# Altium PCB fpga_board.PcbDoc (part 4 of 4)
Units mil, origin at the board's own origin, x right, y up, seen from the top; angles counter-clockwise.
Board outline 3204.72 x 2960.63 mil, 6 copper layers (Top Layer, GND1, SIG, PWR, GND2, Bottom Layer), stack 32.112 mil thick; 192 components, 182 nets, 714 pads, 321 vias.
Unrouted connection lines stored in the file: 11.
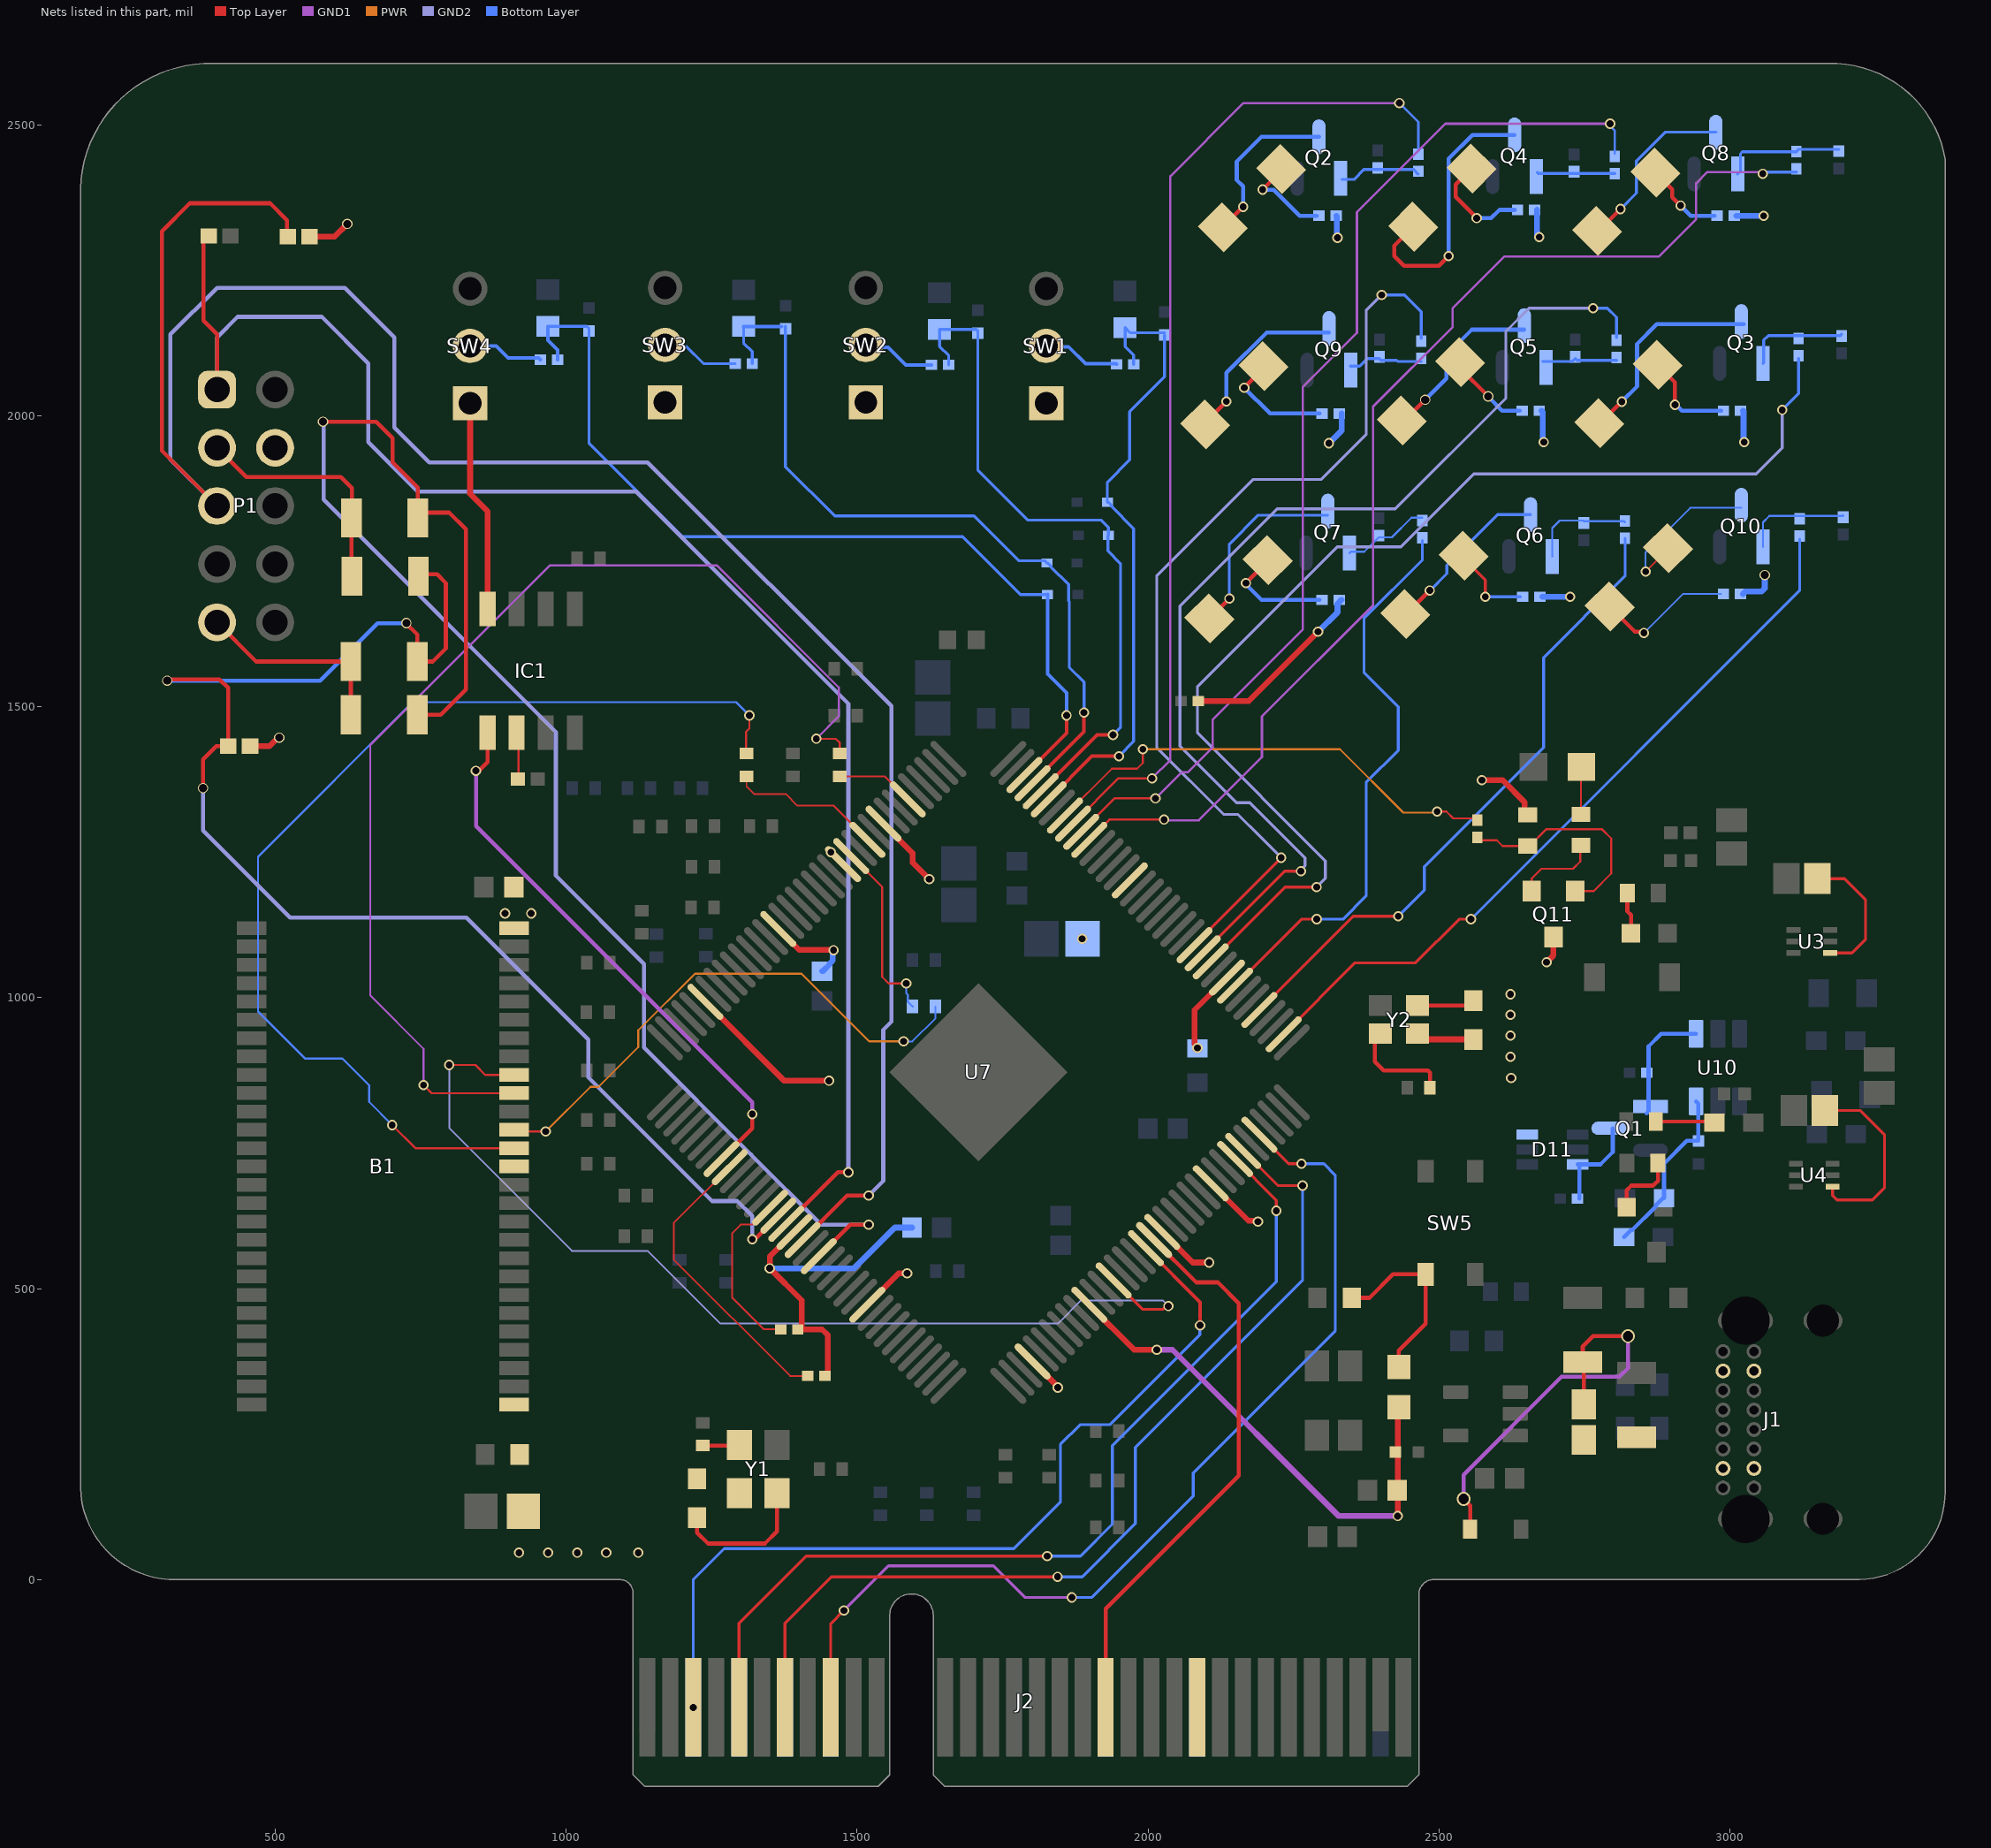
[diagram p7: the nets of this part, all layers, seen from the top]

## Via types
v1: diameter 17.72, hole 11.81, Top Layer to Bottom Layer, 284 vias
v2: diameter 19.68, hole 7.87, Top Layer to Bottom Layer, 25 vias
v3: diameter 17.72, hole 13.78, Top Layer to Bottom Layer, 10 vias
v4: diameter 23.62, hole 17.72, Top Layer to Bottom Layer, 2 vias

## Nets (pads, with @x,y where several pads share a name; then routed paths per layer and width w, separated by ;. In a path a pad name is that pad's centre, name@x,y a point inside that pad or via, vN(x,y) a via of type N, cw(c..) or ccw(c..) an arc to the next point about the centre after c; other vN are vias at no path point) (continued)
INT3: J2.A19 J2.B19 U7.55 | length 979.8
  Top Layer w7: J2.B19@1927.17,-219.49 1927.17,-50.2 2156,178.64 2156,474.9 2120.08,510.83 2083.28,510.83 U7.55@2010.46,583.64
INT4: J2.A23 J2.B23
IO1: R90.2 U7.100 | length 1758.1
  Top Layer w3: U7.100@1871.26,1299.1 U7.100@1871.26,1300.18
  Top Layer w4: U7.100@1871.26,1300.18 1872.34,1300.18 1949.13,1376.97 v1(2006.89,1376.97)
  GND1 w4: v1(2006.89,1376.97) 2038.39,1408.46 2038.39,2411.8 2163.98,2537.4 v1(2432.09,2537.4)
  Bottom Layer w4: v1(2432.09,2537.4) 2464.57,2504.92 R90.2@2464.57,2454.86
IO1_RES: Q2.1 R1_2.2 R90.1 | length 141.2
  Bottom Layer w5: Q2.1@2333.66,2406.1 2353.94,2406.1 2370.92,2423.09 2394.68,2423.09 2456.69,2423.09 R90.1@2464.57,2415.21
IO2: R91.2 U7.84 | length 1858.7
  Top Layer w5: U7.84@2093.97,1076.39 2235.1,1217.52 v1(2262.8,1217.52)
  GND2 w5: v1(2262.8,1217.52) 2262.8,1219.6 2270,1226.81 2270,1240 2175,1335 2152.2,1335 2055,1432.2 2055,1673.11 2221.89,1840 2425,1840 2615,2030 2615,2145 2655,2185 v1(2765,2185)
  Bottom Layer w5: v1(2765,2185) 2789.41,2185 2805.12,2169.29 R91.2@2805.12,2134.84
IO2_RES: Q5.1 R2_2.2 R91.1 | length 130.4
  Bottom Layer w5: Q5.1@2677.99,2093.5 2729.47,2093.5 2734.25,2098.28 2737.34,2095.19 R91.1@2805.12,2095.19
IO3: R92.2 U7.98 | length 1988.7
  Top Layer w4: U7.98@1899.1,1271.26 1933.94,1306.1 v1(2027.56,1306.1)
  GND1 w4: v1(2027.56,1306.1) 2028.66,1305 2087.48,1305 2195.87,1413.39 2195.87,1483.27 2386.81,1674.21 2386.81,2015.75 2523.57,2152.51 2523.57,2184.94 2612.26,2273.62 2877.95,2273.62 2941.93,2337.6 2941.93,2399.61 2961.18,2418.86 v1@3056.43,2418.86
  Bottom Layer w5: v1@3056.15,2417.15 3057.89,2418.88 R92.2@3114.17,2418.88
  other v1: 3056.43,2415.91
IO3_RES: Q8.1 R3_2.2 R92.1 | length 208.6
  Bottom Layer w5: Q8.1@3013.32,2415.68 3018.24,2420.59 3018.24,2450.25 3021.72,2453.74 R92.1@3114.17,2453.74 3118.39,2457.96 R3_2.2@3187.01,2457.96
IO4: R93.2 U7.83 | length 2016.9
  Top Layer w5: U7.83@2107.89,1062.47 2235.42,1190 v1(2289.79,1190)
  GND2 w5: v1(2289.79,1190) 2305,1205.21 2305,1235 2085,1455 2085,1535 2325,1775 2435,1775 2560,1900 3045,1900 3090,1945 v1(3090,2010)
  Bottom Layer w5: v1(3090,2010) 3118.11,2038.11 R93.2@3118.11,2098.28
IO4_RES: Q3.1 R4_2.2 R93.1 | length 178.2
  Bottom Layer w5: Q3.1@3057.09,2090.15 3058.07,2091.13 3058.07,2129.92 3066.09,2137.94 3189.96,2137.94 R4_2.2@3191.93,2139.9
IO5: R94.2 U7.77 | length 1116.2
  Top Layer w5: U7.77@2191.41,978.96 2352.45,1140 v1(2430,1140)
  Bottom Layer w5: v1(2430,1140) 2475,1185 2475,1225 2680,1430 2680,1584.53 2819.88,1724.41 R94.2@2819.88,1789.37
IO5_RES: Q6.1 R5_2.2 R94.1 | length 180.2
  Bottom Layer w3.5: Q6.1@2694.88,1758.45 2694.88,1807.08 2707.68,1819.88 2748.03,1819.88 2749.02,1818.9 2817.91,1818.9 R94.1@2819.88,1816.93
IO6: R95.2 U7.85 | length 1637
  Top Layer w5: U7.85@2080.06,1090.31 2080.06,1091.02 2229.01,1239.98 v1(2229.01,1240.68)
  GND2 w5: v1(2229.01,1240.68) 2193.29,1276.41 2154.7,1315 2130,1315 2015,1430 2015,1725 2180.75,1890.75 2298.23,1890.75 2375,1967.52 2375,2181.1 v1(2401.57,2207.68)
  Bottom Layer w5: v1(2401.57,2207.68) 2440.94,2207.68 2469.49,2179.13 R95.2@2469.49,2133.01
IO6_RES: Q9.1 R6_2.2 R95.1 | length 128.5
  Bottom Layer w5: Q9.1@2348.27,2085.24 2363.78,2085.24 2376.69,2098.14 2397.64,2098.14 2400.31,2095.47 2427.17,2095.47 2429.27,2093.36 R95.1@2469.49,2093.36
IO7: R96.2 U7.99 | length 1861.2
  Top Layer w4: U7.99@1885.18,1285.18 1942.52,1342.52 v1(2012.8,1342.52)
  GND1 w4: v1(2012.8,1342.52) 2057.77,1387.5 2068.6,1387.5 2110.95,1429.85 2110.95,1477.53 2265.95,1632.53 2265.95,2049.37 2359.05,2142.47 2359.05,2350 2511.02,2501.97 v1(2794.29,2501.97)
  Bottom Layer w4: v1(2794.29,2501.97) 2794.29,2498.26 2802.17,2490.38 R96.2@2802.17,2450.79
IO7_RES: Q4.1 R7_2.2 R96.1 | length 133.4
  Bottom Layer w5: Q4.1@2669.29,2417.91 2670.87,2416.34 R96.1@2802.03,2416.34
IO8: R97.2 U7.80 | length 988.3
  Top Layer w5: U7.80@2149.65,1020.71 2263.94,1135 v1(2290,1135)
  Bottom Layer w5: v1(2290,1135) 2335,1135 2375,1175 2375,1370 2430,1425 2430,1500 2371.15,1558.85 2371.15,1651.66 2471.46,1751.97 R97.2@2471.46,1785.29
IO8_RES: Q7.1 R8_2.2 R97.1 | length 150.2
  Bottom Layer w3.5: Q7.1@2346.46,1764.36 2348.43,1766.33 2371.79,1766.33 2387.13,1781.68 2387.13,1781.82 2396.51,1791.2 2419.09,1791.2 2452.84,1824.94 R97.1@2471.46,1824.94
IO9: R98.2 U7.74 | length 1291.1
  Top Layer w5: U7.74@2233.17,937.2 2355.97,1060 2460,1060 2535,1135 v1(2555,1135)
  Bottom Layer w5: v1(2555,1135) 3120.08,1700.08 R98.2@3120.08,1788.25
IO9_RES: Q10.1 R9_2.2 R98.1 | length 185.1
  Bottom Layer w3.5: Q10.1@3057.09,1774.6 3057.09,1816.93 3068.05,1827.9 3193.9,1827.9 R9_2.2@3194.88,1828.88
"JTAG TCK": P1.1 R103.2 U7.16 | length 2768.8
  Top Layer w7: R103.2@384.56,2309.06 376.97,2301.46 376.97,2163.39 400,2140.35 P1.1@400,2045.08 ; U7.16@1378.52,611.48 1467.03,700 v1(1485,700)
  GND2 w7: P1.1@400,2045 400,2135 435,2170 580,2170 660,2090 660,1955 745,1870 1120,1870 1485,1505 v1(1485,700)
"JTAG TDI": R102.2 R111.1 R112.1 U7.15 | length 2491.1
  Top Layer w7: v3@316.93,1547.24 404.25,1547.24 419.15,1532.34 R102.2@419.15,1432.09 398.62,1432.09 375.98,1409.45 v3(375.98,1360.24) ; v3@725.39,1642.72 744.09,1624.02 R111.1@744.09,1577.76 770.67,1577.76 793.31,1600.39 793.31,1712.6 778.24,1727.67 749.32,1727.67 R112.1@746.06,1724.41 ; v1(1320,585) 1324.19,585 U7.15@1364.6,625.4
  GND2 w7: v3(375.98,1360.24) 375.98,1287.4 525.59,1137.8 828.74,1137.8 1038.39,928.15 1038.39,863.19 1250.98,650.59 1294.29,650.59 1320,624.88 v1(1320,585)
  Bottom Layer w7: v3(314.45,1544.96) 577.44,1544.96 676.18,1643.7 v3(725.39,1643.7)
"JTAG TDO": R113.1 R114.1 U7.20 | length 2680.8
  Top Layer w7: v3(582.11,1989.78) 673.61,1989.78 701.77,1961.61 701.77,1920.28 745.08,1876.97 R113.1@745.08,1824.8 ; R114.1@744.09,1486.22 784.45,1486.22 827.76,1529.53 827.76,1805.12 799.21,1833.66 R113.1@746.06,1833.66 ; U7.20@1434.19,555.81 1488.39,610 v1(1520,610)
  GND2 w7: v3@583.17,1989.78 583.17,1855.81 982.28,1456.69 982.28,1209.65 1133.86,1058.07 1133.86,914.37 1317.91,730.32 1438.23,610 v1(1520,610)
"JTAG TMS": P1.5 R101.2 U7.18 | length 3777.6
  Top Layer w7: P1.5@400,1845.08 305.12,1939.96 305.12,2316.93 353.35,2365.16 491.14,2365.16 520.53,2335.77 R101.2@520.53,2308.07 ; U7.18@1406.36,583.64 1482.71,660 v1(1520,660)
  GND2 w7: P1.5@400,1845 320,1925 320,2140 400,2220 620,2220 705,2135 705,1980 765,1920 1140,1920 1558.87,1501.13 1558.87,958.87 1545,945 1545,685 v1(1520,660)
"Lower Byte Mask": B1.15 R67.2 | length 1851.9
  Top Layer w3.5: v1(701.14,781.25) 740.89,741.5 B1.15@910.51,741.5 ; R67.2@1310,1419.68 1309.06,1420.63 1309.06,1456.69 1315,1462.64 v1(1315,1485)
  Bottom Layer w3.5: v1(701.14,781.25) 661.42,820.97 661.42,849.41 615.16,895.67 551.18,895.67 470.47,976.38 470.47,1242.13 736.08,1507.74 1292.26,1507.74 v1(1315,1485)
"Lower Byte Mask Term": R67.1 U7.119 | length 263.5
  Top Layer w3: R67.1@1310,1380.32 1310,1363.23 1323.23,1350 1377.5,1350 1397.5,1330 1460,1330 1517.71,1272.29 U7.119@1517.71,1271.26
MEM_CS: IC1.1 U7.8 | length 958.5
  Top Layer w7: v1@850,1390 865,1405 IC1.1@865,1456.5 ; U7.8@1267.16,722.84 1320,775.68 v1(1320,800)
  GND1 w7: v1(845,1390) 845,1295 1320,820 v1(1320,800)
nCEO: R88.2 U7.101 | length 821.6
  Top Layer w3.5: U7.101@1857.34,1313.02 1938.02,1393.7 1981.3,1393.7 1991.14,1403.54 v1(1991.14,1427.17) ; v1(2497.05,1319.88) 2512.8,1319.88 2524.61,1308.07 2563.84,1308.07 R88.2@2565.94,1310.18
  PWR w3.5: v1(1991.14,1427.17) 2329.72,1427.17 2438.98,1317.91 2495.08,1317.91 v1(2497.05,1319.88)
nCONFIG: R75.2 U7.14 | length 296.8
  Top Layer w3: U7.14@1350.68,639.32 1348.29,639.32 1318.97,610 1300,610 1285,595 1285,485 1340,430 R75.2@1365,430
NetC29_1: C29.1 R109.1 R110.2 U10.3 | length 301.7
  Bottom Layer w7: R110.2@2817.91,588.58 2830.16,600.83 2832.13,600.83 2872.59,641.3 2872.59,643.26 2884.84,655.51 R109.1@2886.81,655.51 2886.81,714.57 2926.18,753.94 C29.1@2945.87,753.94 2945.87,817.91 U10.3@2941.93,821.85
NetCJ_2_2: CJ_2.2 D6.2 FB1.2 | length 696.5
  Top Layer w7: v4(2542.32,138.78) 2554.13,126.97 2554.13,88.58 D6.2@2555.12,87.6 ; FB1.2@2749.02,301.22 2749.02,372.05 CJ_2.2@2747.05,374.02 2747.05,400.59 2764.76,418.31 v4(2824.8,418.31)
  GND1 w7: v4(2542.32,138.78) 2542.32,180.12 2710.63,348.43 2810.04,348.43 2824.8,363.19 v4(2824.8,418.31)
NetD1_1_1: D1_1.1 Q2.3 | length 285.7
  Top Layer w7: D1_1.1@2136.99,2325.62 2136.99,2332.86 v1(2163.39,2359.25)
  Bottom Layer w7: v1(2163.39,2359.25) 2163.39,2394.17 2152.56,2404.99 2152.56,2437.01 2195.02,2479.47 Q2.3@2293.83,2479.47
NetD1_1_2: D1_1.2 R1_1.2 | length 160.1
  Top Layer w7: v1(2196.85,2388.78) 2228.86,2420.79 D1_1.2@2228.86,2423.97
  Bottom Layer w7: v1(2196.85,2388.78) 2197.51,2388.12 2216.21,2388.12 2260.47,2343.86 R1_1.2@2289.91,2343.86
NetD1_2_1: D1_2.1 Q5.3 | length 298.7
  Top Layer w7: D1_2.1@2436.11,1992.21 2441.03,1992.21 v3(2476.38,2027.56)
  Bottom Layer w7: v3(2476.38,2027.56) 2512.8,2063.98 2512.8,2104.33 2556.5,2148.03 Q5.3@2646.65,2148.03
NetD1_2_2: D1_2.2 R2_1.2 | length 143.6
  Top Layer w7: D1_2.2@2536.33,2092.43 2536.33,2081.78 v3(2584.65,2033.46)
  Bottom Layer w7: v3(2584.65,2033.46) 2584.65,2032.96 2608.75,2008.86 R2_1.2@2638.75,2008.86
NetD1_3_1: D1_3.1 Q8.3 | length 306.7
  Top Layer w7: D1_3.1@2771.74,2318 2774.69,2318 v1(2812.01,2355.32)
  Bottom Layer w5: v1(2812.01,2355.32) 2839.39,2382.7 2839.39,2437.97 2888.77,2487.35 Q8.3@2975.92,2487.35
NetD1_3_2: D1_3.2 R3_1.2 | length 140.6
  Top Layer w7: D1_3.2@2871.96,2418.22 2901.08,2389.1 2901.08,2375.5 v1(2915.35,2361.22)
  Bottom Layer w7: v1(2915.35,2361.22) 2932.72,2343.86 R3_1.2@2973.75,2343.86
NetD2_1_1: D2_1.1 Q3.3 | length 361.4
  Top Layer w7: D2_1.1@2775.68,1987.29 2777.18,1987.29 v1(2814.24,2024.34)
  Bottom Layer w7: v1(2814.24,2024.34) 2840.55,2050.66 2840.55,2123.64 2874.53,2157.62 Q3.3@3023.75,2157.62
NetD2_1_2: D2_1.2 R4_1.2 | length 162.4
  Top Layer w7: D2_1.2@2875.9,2087.51 2905.69,2057.72 v1(2905.69,2018.95)
  Bottom Layer w7: v1@2907.48,2018.7 2917.32,2008.86 R4_1.2@2984.91,2008.86
NetD2_2_1: D2_2.1 Q6.3 | length 294.5
  Top Layer w7: D2_2.1@2442.02,1659.54 2443.98,1659.54 v1(2484.25,1699.8)
  Bottom Layer w5: v1(2484.25,1699.8) 2484.7,1699.8 2513.75,1728.86 2513.75,1743.08 2600.79,1830.12 Q6.3@2657.48,1830.12
NetD2_2_2: D2_2.2 R5_1.2 | length 146.5
  Top Layer w5: D2_2.2@2542.24,1759.76 2542.24,1755.01 2579.72,1717.52 v1(2579.72,1688.98)
  Bottom Layer w5: v1(2579.72,1688.98) 2639.79,1688.98 R5_1.2@2639.91,1688.86
NetD2_3_1: D2_3.1 Q9.3 | length 290.9
  Top Layer w7: D2_3.1@2108.75,1998.86 2109.09,1998.86 v1(2134.84,2024.61)
  Bottom Layer w7: v1(2134.84,2024.61) 2134.84,2073.82 2204.13,2143.11 Q9.3@2311.02,2143.11
NetD2_3_2: D2_3.2 R6_1.2 | length 199.1
  Top Layer w7: v1(2165.35,2048.23) 2198.73,2081.61 D2_3.2@2198.73,2085.54
  Bottom Layer w7: v1(2165.35,2048.23) 2209.72,2003.86 R6_1.2@2294.91,2003.86
NetD3_1: D3.1 R9.2 | length 71.9
  Top Layer w7: R9.2@2823.82,1180.12 2823.82,1148.62 2829.98,1142.46 D3.1@2829.98,1110.82
NetD3_1_1: D3_1.1 Q4.3 | length 468.5
  Top Layer w7: D3_1.1@2455.8,2324.89 2423.23,2292.32 2423.23,2274.61 2439.96,2257.87 2500,2257.87 v1(2516.73,2274.61)
  Bottom Layer w7: v1(2516.73,2274.61) 2516.73,2441.93 2557.49,2482.68 Q4.3@2629.92,2482.68
NetD3_1_2: D3_1.2 R7_1.2 | length 183.2
  Top Layer w7: D3_1.2@2556.02,2425.11 2528.54,2397.64 2528.54,2375.98 v1(2564.96,2339.57)
  Bottom Layer w7: v1(2564.96,2339.57) 2589.57,2339.57 2603.86,2353.86 R7_1.2@2630.22,2353.86
NetD3_2_1: D3_2.1 Q7.3 | length 331.9
  Top Layer w7: D3_2.1@2105.4,1651.66 v1(2139.76,1686.02)
  Bottom Layer w5: v1(2139.76,1686.02) 2139.76,1779.53 2189.37,1829.13 Q7.3@2309.06,1829.13
NetD3_2_2: D3_2.2 R8_1.2 | length 194.4
  Top Layer w7: v1(2168.31,1712.6) 2205.62,1749.91 D3_2.2@2205.62,1751.88
  Bottom Layer w7: v1(2168.31,1712.6) 2168.31,1710.63 2195.08,1683.86 R8_1.2@2294.91,1683.86
NetD3_3_1: D3_3.1 Q10.3 | length 285.3
  Top Layer w3: v1(2855.31,1732.28) 2893.61,1770.58 D3_3.1@2893.61,1772.55
  Bottom Layer w3: v1(2855.31,1732.28) 2855.31,1765.32 2931.93,1841.93 Q10.3@3019.68,1841.93
NetD3_3_2: D3_3.2 R9_1.2 | length 238
  Top Layer w7: D3_3.2@2793.39,1672.33 2836.71,1629.02 2850.31,1629.02 v1(2852.36,1626.97)
  Bottom Layer w3: v1(2852.36,1626.97) 2919.25,1693.86 R9_1.2@2984.91,1693.86
NetD4_1: D4.1 R10.2 | length 117.3
  Top Layer w7: D4.1@2822.83,639.76 2822.83,669.29 2830.71,677.17 2868.03,677.17 2872.13,681.27 2872.42,681.27 2876.52,685.37 R10.2@2876.52,712.81
NetD5_2: D5.2 R89.1 | length 82
  Top Layer w3.5: R89.1@2744.09,1315.03 2744.09,1395.67 D5.2@2745.08,1396.65
NetIC1_2: IC1.2 R100.2 | length 81.1
  Top Layer w3.5: IC1.2@914.96,1455.71 918.22,1452.45 R100.2@918.22,1375.98
NetL1_1: L1.1 U3.4 | length 236.7
  Top Layer w5: L1.1@3150.47,1205 3150.75,1204.72 3196.85,1204.72 3233.27,1168.31 3233.27,1100.39 3209.65,1076.77 U3.4@3172.24,1076.77
NetL2_1: L2.1 U4.4 | length 327.1
  Top Layer w5: L2.1@3163.42,806.1 3224.41,806.1 3265.75,764.76 3265.75,673.23 3245.08,652.56 3184.06,652.56 3176.5,660.12 U4.4@3176.5,675.32
NetQ11_1: Q11.1 R87.1 R88.1 | length 387.4
  Top Layer w3.5: R88.1@2565.94,1270.53 2599.55,1270.53 2609.32,1260.76 R87.1@2652.56,1260.76 2655.58,1260.76 2684.19,1289.37 2780.51,1289.37 2796.26,1273.62 2796.26,1213.58 2765.75,1183.07 Q11.1@2734.25,1183.07
NetQ11_2: Q11.2 R89.2 | length 145.4
  Top Layer w3.5: Q11.2@2659.45,1183.07 2659.45,1204.72 2676.18,1221.46 2730.31,1221.46 2743.11,1234.25 2743.11,1260.76 R89.2@2744.09,1261.74
NetR7_2: R7.2 R8.1 | length 101.2
  Top Layer w6: R8.1@2873.03,787.4 2971.46,787.4 R7.2@2973.43,785.43
NetR70_2: R70.2 Y1.1 | length 245.4
  Top Layer w7: R70.2@1225,106.54 1225,80.81 1243.81,62.01 1341.54,62.01 1362.48,82.95 Y1.1@1362.48,148.66
NetR71_2: R71.2 Y2.1 | length 99.2
  Top Layer w7: Y2.1@2463.35,986.61 2550.59,986.61 R71.2@2559.06,995.08
NetR72_1: R72.1 Y1.3 | length 63.4
  Top Layer w7: R72.1@1234.57,230.32 1296.5,230.32 Y1.3@1297.52,231.34
NetR73_1: R73.1 Y2.3 | length 169
  Top Layer w7: Y2.3@2390,930.04 2390,890 2405,875 2480.9,875 2485,870.9 2485,845.32 R73.1@2484.68,845
NetR105_1: R105.1 SW1.2 | length 133.9
  Bottom Layer w6: SW1.2@1825,2120 1826.24,2118.76 1863.53,2118.76 1892.72,2089.57 1944.88,2089.57 R105.1@1945.87,2088.58
NetR106_1: R106.1 SW2.2 | length 127
  Bottom Layer w6: SW2.2@1515,2121.57 1518.84,2117.73 1553.53,2117.73 1583.66,2087.6 R106.1@1627.95,2087.6
NetR107_1: R107.1 SW3.2 | length 133.6
  Bottom Layer w5: SW3.2@1170,2121.57 1172.81,2118.76 1207.03,2118.76 1236.22,2089.57 R107.1@1290.35,2089.57
NetR108_1: R108.1 SW4.2 | length 130.5
  Bottom Layer w6: SW4.2@835,2120 880,2120 900.59,2099.41 952.76,2099.41 R108.1@955.71,2096.46
NRST: C35.1 R61.2 SW5.1 | length 323.2
  Top Layer w7: C35.1@2349.41,484.25 2380.91,484.25 2421.26,524.61 SW5.1@2477.36,524.61 2477.36,439.96 2431.1,393.7 R61.2@2431.1,365.22
nSTATUS: R76.2 U7.9 | length 508.2
  Top Layer w3: U7.9@1281.08,708.92 1185,612.84 1185,550 1385,350 R76.2@1411.67,350
"Row Address Strobe": B1.18 R65.2 | length 1969.6
  Top Layer w3.5: v1(755,850) 769.02,835.98 B1.18@910.51,835.98 ; v1(1430,1445) 1463.46,1445 1470.47,1437.99 1470.47,1420.16 R65.2@1470,1419.68
  GND1 w3.5: v1(755,850) 755,912.32 663.39,1003.94 663.39,1434.06 972.44,1743.11 1258.86,1743.11 1468.5,1533.46 1468.5,1483.5 v1(1430,1445)
"Row Address Strobe Term": R65.1 U7.114 | length 133.7
  Top Layer w3: R65.1@1470,1380.32 1547.85,1380.32 U7.114@1587.31,1340.86
"SDRAM Select": B1.19 U7.50 | length 1739.6
  Top Layer w3.5: v1(799.01,884.32) 844.03,884.32 860.87,867.48 B1.19@910.51,867.48
  Top Layer w5: U7.50@1940.86,514.05 1990.34,464.57 2026.13,464.57 2031.56,470 v1(2035,470)
  GND2 w3: v1(799.01,884.32) 799.01,775.99 1010,565 1140,565 1264.12,440.88 1265,440 1267.49,440 1672.22,440.54 cw(c1672.24,426.18) 1672.29,440.54 1842.51,440 1845,440 1845.88,440.88 1885,480 2025,480 v1(2035,470)
"SPI MISO": J2.A9 J2.B9 U7.68 | length 1714.1
  Top Layer w5: J2.B9@1454.72,-219.49 1454.72,-75.79 v1(1477.36,-53.15) ; U7.68@2191.41,764.6 2241.44,714.57 v1(2263.78,714.57)
  GND1 w5: v1(1477.36,-53.15) 1554.13,23.62 1734.25,23.62 1788.39,-30.51 v1(1869.09,-30.51)
  Bottom Layer w5: v1(1869.09,-30.51) 1903.54,-30.51 2077.76,143.7 2077.76,183.07 2321.85,427.17 2321.85,694.91 2302.19,714.57 v1(2263.78,714.57)
"SPI MOSI": J2.A7 J2.B7 U7.66 | length 1644.6
  Top Layer w5: J2.B7@1375.98,-219.49 1375.98,-74.8 1455.71,4.92 v1(1844.49,4.92) ; U7.66@2163.57,736.76 2223.16,677.17 v1(2265.75,677.17)
  Bottom Layer w5: v1(1844.49,4.92) 1886.81,4.92 1978.35,96.46 1978.35,227.36 2265.75,514.76 v1(2265.75,677.17)
"SPI SCK": J2.A5 J2.B5 U7.65 | length 1630.2
  Top Layer w5: J2.B5@1297.24,-219.49 1297.24,-74.8 1412.4,40.35 v1(1826.77,40.35) ; U7.65@2149.65,722.84 2220.47,652.02 v1(2220.47,633.86)
  Bottom Layer w5: v1(1826.77,40.35) 1883.86,40.35 1938.98,95.47 1938.98,230.32 2220.47,511.81 v1(2220.47,633.86)
SW_IN1: C30.1 D7.1 R53.2 R105.2 U7.103 | length 1086.4
  Top Layer w6: U7.103@1829.51,1340.86 1903.64,1415 v1(1950,1415)
  Bottom Layer w5: v1(1950,1415) 1975.39,1440.39 1975.39,1806.1 1937.07,1844.43 1937.07,1846 1931.69,1851.38 D7.1@1930.12,1851.38 1930.12,1885.83 1968.5,1924.21 1968.5,2006.89 2028.54,2066.93 C30.1@2028.54,2138.5 ; R105.2@1975.39,2088.58 1975.39,2104.33 1960.63,2119.09 R53.2@1960.63,2151.57 1969.49,2142.72 C30.1@2028.54,2142.72
SW_IN2: C31.1 D8.1 R54.2 R106.2 U7.104 | length 1174.6
  Top Layer w6: U7.104@1815.59,1354.78 1912.58,1451.77 v1(1939.96,1451.77)
  Bottom Layer w5: R106.2@1657.48,2087.6 1657.48,2103.35 1641.73,2119.09 R54.2@1641.73,2148.62 1704.72,2148.62 1707.68,2145.67 C31.1@1707.68,2141.73 1707.68,1906.5 1793.31,1820.87 1919.29,1820.87 1932.09,1808.07 D8.1@1932.09,1794.29 1931.1,1793.31 1931.1,1767.72 1952.76,1746.06 1952.76,1464.57 v1(1939.96,1451.77)
SW_IN3: C32.1 D9.1 R55.2 R107.2 U7.105 | length 1336.5
  Top Layer w6: U7.105@1801.67,1368.7 1890,1457.03 v1(1890,1490)
  Bottom Layer w5: R55.2@1305,2153.5 1305,2125.12 1319.88,2110.24 R107.2@1319.88,2089.57 ; C32.1@1376.97,2153.54 C32.1@1376.97,2149.61 1376.97,1912.4 1461.61,1827.76 1700.79,1827.76 1777.56,1750.98 1822.44,1750.98 D9.1@1826.38,1747.05 1827.95,1747.05 1833.33,1741.67 1833.33,1740.1 1863.38,1710.04 1863.38,1682.35 1864.73,1681 1864.73,1567.36 1890,1542.09 v1(1890,1490)
  Bottom Layer w6: R55.2@1305,2153.5 C32.1@1370.12,2153.5
SW_IN4: C33.1 D10.1 R56.2 R108.2 U7.106 | length 1582.8
  Top Layer w6: U7.106@1787.75,1382.62 1860,1454.87 v1(1860,1485)
  Bottom Layer w5: R56.2@968.5,2153.54 1035.43,2153.54 1039.37,2149.61 C33.1@1039.37,2145.67 1039.37,1952.63 1199.77,1792.23 1681.19,1792.23 1780.51,1692.91 D10.1@1827.36,1692.91
  Bottom Layer w6: R56.2@968.5,2153.54 968.5,2129.92 985.24,2113.19 R108.2@985.24,2096.46 ; D10.1@1827.36,1692.91 1827.36,1556.5 1860,1523.86 v1(1860,1485)
TRGASDO: P1.9 R111.2 R114.2 | length 349.3
  Top Layer w7: P1.9@400,1645.08 467.32,1577.76 R111.2@629.92,1577.76 R114.2@629.92,1486.22
TRGTDO: P1.3 R112.2 R113.2 | length 403.6
  Top Layer w7: P1.3@400,1945.08 450.39,1894.68 613.19,1894.68 631.89,1875.98 R113.2@631.89,1833.66 ; R113.2@630.91,1824.8 630.91,1725.39 R112.2@631.89,1724.41
VBUS: CJ_1.2 FB1.1 J1.A4 J1.A9 J1.B4 J1.B9
VCC: B1.1 B1.14 B1.27 C11.2 C12.2 C13.1 C14.2 C23.1 C24.2 C26.1 C27.1 C28.2 D11.6 IC1.8 P1.4 Q11.3 R1_1.1 R2_1.1 R3_1.1 R4_1.1 R5_1.1 R6_1.1 R7_1.1 R8_1.1 R9_1.1 R61.1 R70.1 R71.1 R74.1 R75.1 R76.1 R87.2 R101.1 R102.1 SW1.1 SW2.1 SW3.1 SW4.1 U7.17 U7.26 U7.40 U7.47 U7.56 U7.62 U7.81 U7.93 U7.117 U7.122 U7.130 U7.139 Y1.4 Y2.4 | length 4014.5
  Top Layer w10: R102.1@456.83,1432.09 490.04,1432.09 504.8,1446.85 v3(506.89,1446.85) ; R101.1@560.18,2308.07 602.36,2308.07 v3(624.02,2329.72) ; SW4.1@835,2021.57 835,1865.79 864.96,1835.83 IC1.8@864.96,1668.31 ; C26.1@918,213 C26.1@920.47,215.47 ; U7.139@1239.32,992.88 1374.91,857.28 v1(1451.77,857.28) ; U7.130@1364.6,1118.15 1400.47,1082.28 1459.06,1082.28 v1(1459.65,1081.69) ; U7.17@1392.44,597.56 1350,555.13 v1(1350,535) 1405,480 1405,433.34 1401.66,430 1440,430 1450,420 1450,351.67 R76.1@1448.33,350 ; U7.26@1517.71,472.29 1571.67,526.25 v1(1586.14,526.25) ; U7.117@1545.14,1298.69 1595.47,1248.36 1595.47,1232.28 v1(1624.02,1203.74) ; U7.40@1801.67,374.85 1845,331.52 v1(1845,330) ; U7.47@1899.1,472.29 1976.39,395 v1(2015,395) ; U7.93@1968.33,1201.67 U7.93@1968.7,1201.67 ; U7.56@2024.38,597.56 2076.94,545 v1(2105,545) ; v1(2085,913.56) 2085,915.65 2080,920.65 2080,978.9 U7.81@2135.73,1034.63 ; R74.1@2090,1510 2173.39,1510 v1(2292.32,1628.94) ; U7.62@2108.09,681.28 2172.74,616.63 2187.5,616.63 v1(2188.98,615.16) ; v1(2429.13,109.25) 2429.13,294.22 R61.1@2431.1,296.19 ; Y2.4@2472.68,930.04 2474.21,928.5 R71.1@2551.18,928.5 ; v1(2573.82,1374.02) 2609.25,1374.02 2647.12,1336.15 2647.12,1319.49 R87.2@2652.56,1314.04 ; v1(2685.04,1061.02) 2696.85,1072.83 Q11.3@2696.85,1104.33
  GND1 w10: v1(2015,395) 2042.01,395 2327.76,109.25 v1(2429.13,109.25)
  Bottom Layer w10: v1(1350,535) 1495,535 1565,605 C11.2@1594.41,605 ; C12.2@1440,1045.59 1440.98,1045.59 1452.72,1057.32 1452.72,1058.31 1458.17,1063.76 1458.17,1080.22 v1(1459.65,1081.69) ; v1(2292.32,1628.94) 2325.65,1662.27 2325.65,1676.92 R8_1.1@2332.59,1683.86 ; v1(2311.02,1952.76) 2332.59,1974.32 R6_1.1@2332.59,2003.86 ; R1_1.1@2323.51,2343.86 2324.65,2342.72 2324.65,2307.24 v1(2325.79,2306.1) ; R7_1.1@2668.75,2353.86 2668.75,2312.67 2672.24,2309.17 v1(2672.24,2307.09) ; R2_1.1@2676.43,2008.86 2678.64,2006.65 2678.64,1956.2 v1(2680.12,1954.72) ; R5_1.1@2677.59,1688.86 2677.65,1688.92 2725.33,1688.92 v1(2725.39,1688.98) ; R3_1.1@3011.43,2343.86 3011.61,2343.68 3057.89,2343.68 v1(3058.07,2343.5) ; R9_1.1@3022.59,1693.86 3026.57,1697.83 3054.18,1697.83 3060.04,1703.69 v3(3060.04,1726.38) ; R4_1.1@3022.59,2008.86 3023.6,2007.85 3023.6,1955.73 v1(3024.61,1954.72)
  other v1: 919.02,46.26 969.02,46.26 1019.02,46.26 1069.02,46.26 1124.02,46.26 2624.02,862.2 2623.03,898.62 2623.03,935.04 2623.03,970.47 2623.03,1005.91 1886.93,1101.38 895,1145 940,1145 1455,1250
VCC_EN_CNTRL: Q1.1 R83.1 U10.4 | length 207.3
  Bottom Layer w7: 2856.69,801.18 2860.24,804.72 2860.24,871.06 2860.24,916.34 2881.89,937.99 U10.4@2941.93,937.99
VCC_EN_N: D11.3 Q1.3 R84.2 | length 170.5
  Bottom Layer w7: R84.2@2741.14,654.53 2741.14,710.63 D11.3@2738.19,713.58 2777.56,713.58 2798.82,734.84 Q1.3@2798.82,775.59
WAKEUP: J2.A3 J2.B3 U7.54 | length 1509.3
  Top Layer w6: U7.54@1996.54,569.73 2089.57,476.7 v1@2089.57,437.99
  Bottom Layer w5: v1(1218.5,-219.49) 1218.5,0 1271.65,53.15 1769.68,53.15 1849.41,132.87 1849.41,232.28 1883.37,266.24 1934.55,266.24 2088.96,420.65 2088.96,436.4 v1(2089.57,437.01)
"Write Enable": B1.16 R69.2 | length 939.5
  Top Layer w3.5: B1.16@910.51,772.99 913.5,770 v1(965,770)
  PWR w3.5: v1(965,770) 1041.99,846.99 1055.65,846.99 1124.02,915.35 1124.02,943.9 1221.46,1041.34 1404.53,1041.34 1520.87,925 v1(1580,925)
  Bottom Layer w3: v1(1580,925) 1595,925 1634.68,964.68 R69.2@1634.68,985
"Write Enable Term": R69.1 U7.121 | length 319.9
  Top Layer w3.5: U7.121@1489.87,1243.43 1543,1190.3 1543,1035.8 1554.2,1024.61 v1(1584.65,1024.61)
  Bottom Layer w3.5: v1(1584.65,1024.61) 1584.65,1007.84 1587.22,1005.26 1587.22,993.09 R69.1@1595.31,985
pads on no net: B1.3 B1.6 B1.9 B1.12 B1.40 B1.41 B1.43 B1.46 B1.49 B1.52 D2.2 D11.4 IC1.3 IC1.7 J1.A6 J1.A7 J1.A8 J1.B6 J1.B7 J1.B8 J2.A2 J2.A27 J2.A28 J2.A29 J2.B1 J2.B2 J2.B27 J2.B28 J2.B29 P1.6 P1.7 P1.8 Q1.2 SW5.2 U7.30 U7.44 U7.51 U7.52 U7.53 U7.58 U7.60 U7.64 U7.67 U7.69 U7.70 U7.71 U7.72 U7.73 U7.75 U7.76 U7.86 U7.87 U7.88 U7.89 U7.90 U7.112 U7.113 U7.137 U7.143 U8.4
copper on no net: | length 10.3
  Top Layer w7: 1391.63,146.14 1391.63,156.44

## Polygon pours and split planes (outlines as drawn)
GND on Top Layer "GND" (solid, remove dead copper, pour order 25): 2462.6,-355.32 2465.55,-352.36 2465.55,-16.89 3248.86,-16.89 3365,99.41 3365,2605 2130,2605 2125,2600 160,2600 160,-22.64 1129.92,-22.64 1129.92,-343.5 1141.73,-355.32
VCC on Top Layer "VCC" (solid, remove dead copper, pour order 9): 1185.04,0 1258.8,73.76 1330,73.76 1330,200 970,200 960,210 960,315 885,315 885,700 935,700 935,720 825,720 825,300 890,235 890,0
VCC on Top Layer "+MCU" (solid, remove dead copper, pour order 3): 2423.23,955.71 2422.24,954.72 2422.24,889.76 2497.05,889.76 2579.72,807.09 2676.18,807.09 2676.18,1051.18 2423.23,1051.18
1.2V on Top Layer "2.5V_OUT" (solid, remove dead copper, pour order 19): 2857.28,1146.65 2900.59,1146.65 2900.59,1204.72 2898.62,1206.69 2857.28,1206.69 2857.28,1253.94 2940.94,1253.94 2965.55,1278.54 3196.85,1278.54 3261.81,1213.58 3261.81,961.62 2864.12,961.62 2865.84,900 2790.35,900 2790.35,1125.66 2857.68,1125.66 2857.28,1126.06
2.5V on Top Layer "1.25V_POWER_OUT" (solid, remove dead copper, pour order 4): 2934.33,760 2927.23,767.1 2927.23,869.16 3305.06,869.16 3306.1,868.11 3306.1,547.24 2845,547.24 2845,679.13 2895,679.13 2895,760
3v3 on Top Layer "VCC" (solid, remove dead copper, pour order 0): 2347.44,22.64 2315.94,54.13 2315.94,425.2 2376.97,425.2 2385.83,416.34 2385.83,124.02 2466.54,124.02 2466.54,251.97 2494.09,279.53 2495.08,278.54 2571.85,278.54 2571.85,209.65 2554.13,191.93 2507.87,191.93 2499.02,183.07 2500,182.09 2500,-5.91 2466.54,-5.91 2466.54,-15.91 2465.55,-16.89 2465.55,-328.9 2444.88,-349.57 2347.44,-349.57
5V on Top Layer "5V" (solid, remove dead copper, pour order 21): 2602.88,266.06 2603.94,265 2700,265 2700,155 2870,155 2870,52.17 2605.25,52.17
VBUS on Top Layer "VBUS" (solid, remove dead copper, pour order 22): 3080,215 3085,220 3120,220 3120,345 2950,345 2950,375 3175,375 3175,165 2700,165 2700,265 2884,265 2895,254 2895,215
VCC on Top Layer "VCC" (solid, remove dead copper, pour order 7): 1946.85,1220.47 1982,1255.62 1987.79,1255.62 2009.99,1233.42 1918.31,1141.73 1918.31,1070.87 1858.27,1070.87 1858.27,1131.89 1947.83,1221.46
VCC on Top Layer "VCC" (solid, remove dead copper, pour order 17): 875.02,1099.42 875.69,1098.75 971.14,1098.75 971.14,1218.86 930,1260 875,1260
GND on Bottom Layer "GND" (solid, remove dead copper, pour order 24): 2615,525 2615,24.48 2508.73,24.48 2465.55,-18.7 2465.55,-336.61 2464.57,-336.61 2445.87,-355.32 1650.59,-355.32 1630.91,-335.63 1630.91,-62.01 1620.08,-51.18 1566.93,-51.18 1556.1,-62.01 1556.1,-335.63 1536.42,-355.32 1134.84,-355.32 1115.16,-335.63 1115.16,-22.64 1091.54,0.98 171.26,0.98 171.26,518.74 165,525 165,2605.32 3350,2605.32 3350,20 2875,20 2875,150 2870,155 2735,155 2735,525
VCC on Bottom Layer "+MCU" (solid, remove dead copper, pour order 8): 2675.2,750.98 2675.2,794.29 2676.18,795.28 2675.2,796.26 2675.2,1049.21 2423.23,1049.21 2423.23,804.13 2476.38,750.98
5V on Bottom Layer "5V" (solid, remove dead copper, pour order 23): 2735,525 2735,155 2870,155 2870,0 2615,0 2615,80 2615,525
3v3 on Bottom Layer "VCC" (solid, remove dead copper, pour order 11): 2346.9,7.11 2441.93,7.11 2441.93,-322.07 2435.48,-328.52 2346.9,-328.52 2346.9,-22.42
GND on GND2 "GND" (solid, remove dead copper, pour order 16): 171.8,2605.48 170,2603.69 170,-355.32 3370,-355.32 3370,2605
2.5V on GND2 "2.5V" (solid, remove dead copper, pour order 14): 998.03,1560 1419.19,1560 2900,1560 2900,808.07 2901.37,806.7 3014.76,806.7 3014.76,534.45 2900,534.45 2900,295 998.03,295 998.03,1092.52
VCC on GND2 "3v3" (solid, remove dead copper, pour order 15): 1200.81,1870 1510.81,1560 3080,1560 3085,1565 3085,2605 2020,2605 2020,2060 675,2060 675,1655 695,1635 810,1635 810,1845 835,1870
GND on PWR "GND" (solid, remove dead copper, pour order 18): 165,2605 165,-355.32 3370,-355.32 3370,2605
1.2V on PWR "VCC" (solid, remove dead copper, pour order 12): 2846.46,896.65 2969.49,896.65 2969.49,976.38 2999.02,1005.91 2998.03,1006.89 2998.03,1125 2720.47,1125 2720.47,927.17 2777.56,870.08 2777.56,820.16 2759.84,802.45 2759.84,734.25 2300.75,734.25 2245,790 2330,875 2228.48,976.52 2228.35,978.35 2298.23,1048.23 2235.24,1111.22 2229.33,1111.22 2161.56,1043.44 1720,1485 1105,870 1219.29,755.71 1134.35,670.77 1182.09,623.03 1186.02,619.09 1270.97,704.03 1516.54,458.46 1475.39,417.32 1475.39,387.8 1493.11,370.08 1549.02,425.98 1615,360 1650,325 1710,265 1720,265 2087.5,632.5 2138.31,581.69 2846.46,581.69
VCC on SIG "VCC" (solid, remove dead copper, pour order 26): 2488.19,-355.32 2486.22,-353.35 2486.22,-17.72 3288.39,-17.72 3295.77,-11.32 3370.62,63.53 3370.62,2605 165,2605 165,-355.32
3v3 on SIG "3v3" (solid, remove dead copper, pour order 6): 2344.49,-353.35 2344.49,382.94 2673.23,711.68 2673.23,1089.57 2802.17,1218.5 3252.95,1218.5 3252.95,612.2 2805.12,612.2 2463.58,270.67 2463.58,-353.35
GND on GND1 "GND" (solid, remove dead copper, pour order 5): 3365,-355.32 3365,2605 165,2605 165,-355.32

## Keep-outs
Keep-Out Layer:
  lines w5: 1115.16,-336.61 1115.16,-25.59 ; 1557.09,-337.6 1557.09,-68.9 cw(c1592.12,-62.85) 1626.97,-69.88 1626.97,-337.6 ; 2461.61,-337.6 2461.61,-26.57
  lines w40: 330,0 cw(c337.5,172.5) 165,180 165,2385 cw(c392.5,2382.5) 395,2610 3170,2610 cw(c3170,2410.45) 3369.55,2410.45 3369.54,169.99 cw(c3202.29,167.26) 3205.01,0.01 ; 332.68,-1.97 1073.82,-1.97 ; 1068.9,-2.95 cw(c1080.71,-37.4) 1115.16,-25.59 ; 1115.16,-336.61 1136.81,-358.27 1536.42,-358.27 1557.09,-337.6 ; 1626.97,-337.6 1647.64,-358.27 2440.94,-358.27 2461.61,-337.6 ; 2461.61,-26.57 cw(c2487.2,-28.54) 2489.17,-2.95 ; 2489.17,0.01 3205.01,0.01 ; 3205,0 3205.01,0.01

## Silkscreen, mask and mechanical layers (free items; w line width, h text height)
Top Overlay:
  lines w10: 2018.75,1558.86 2853.75,1558.86 2993.75,1698.86 2993.75,2518.86 2178.75,2518.86 2018.75,2358.86 2018.75,1558.86
  text "FPGA PROM" at 1076.77,1554.63 h45
  text "3x3 LED Matrix" at 2340,1505.5 h45
  text "UBC Blaster" at 345.47,1489.67 h45
  text "1.2V & 2.5V" at 2865,1425.75 h45
  text "POR Indicator" at 2311.02,1392.23 h45
  text "25MHz" at 2334.96,1075.5 h45
  text "SDRAM" at 595,185.5 h45
  text "50MHz" at 1415,100.5 h45
Mechanical 1:
  lines w7.87: 165.35,158.46 165.35,2390.75 cw(c386.81,2383.86) 393.7,2605.31 3169.29,2605.32 cw(c3175.27,2407.99) 3370.08,2439.96 3369.93,151.47 cw(c3220.41,149.7) 3222.18,0.17 2490.33,0.17 ccw(c2491.31,-25.59) 2465.55,-26.57 2465.55,-334.65 2465.55,-335.63 2445.87,-355.32 1650.59,-355.32 1630.91,-335.63 1630.91,-61.02 ccw(c1593.5,-61.97) 1556.1,-62.99 1556.1,-335.63 1536.42,-355.32 1134.96,-355.32 1115.16,-335.52 1115.16,-20.67 ccw(c1091.54,-23.62) 1088.58,0 330.67,0.04 cw(c327.23,161.87) 165.39,158.43 165.37,158.45 ; 165.35,158.46 165.37,158.45

## Text inside footprints (layer, text, board x,y; h text height)
J2: Mechanical 7 "PCB Thickness 1.57 mm" at 1279.99,-335.33 h19.68